# Altium PCB Carte_Barriere_Optique_Interface.PcbDoc
Units mm, origin at the board's own origin, x right, y up, seen from the top; angles counter-clockwise.
Board outline 16.25 x 52.25 mm, 2 copper layers (Top Layer, Bottom Layer); 28 components, 18 nets, 72 pads, 0 vias.
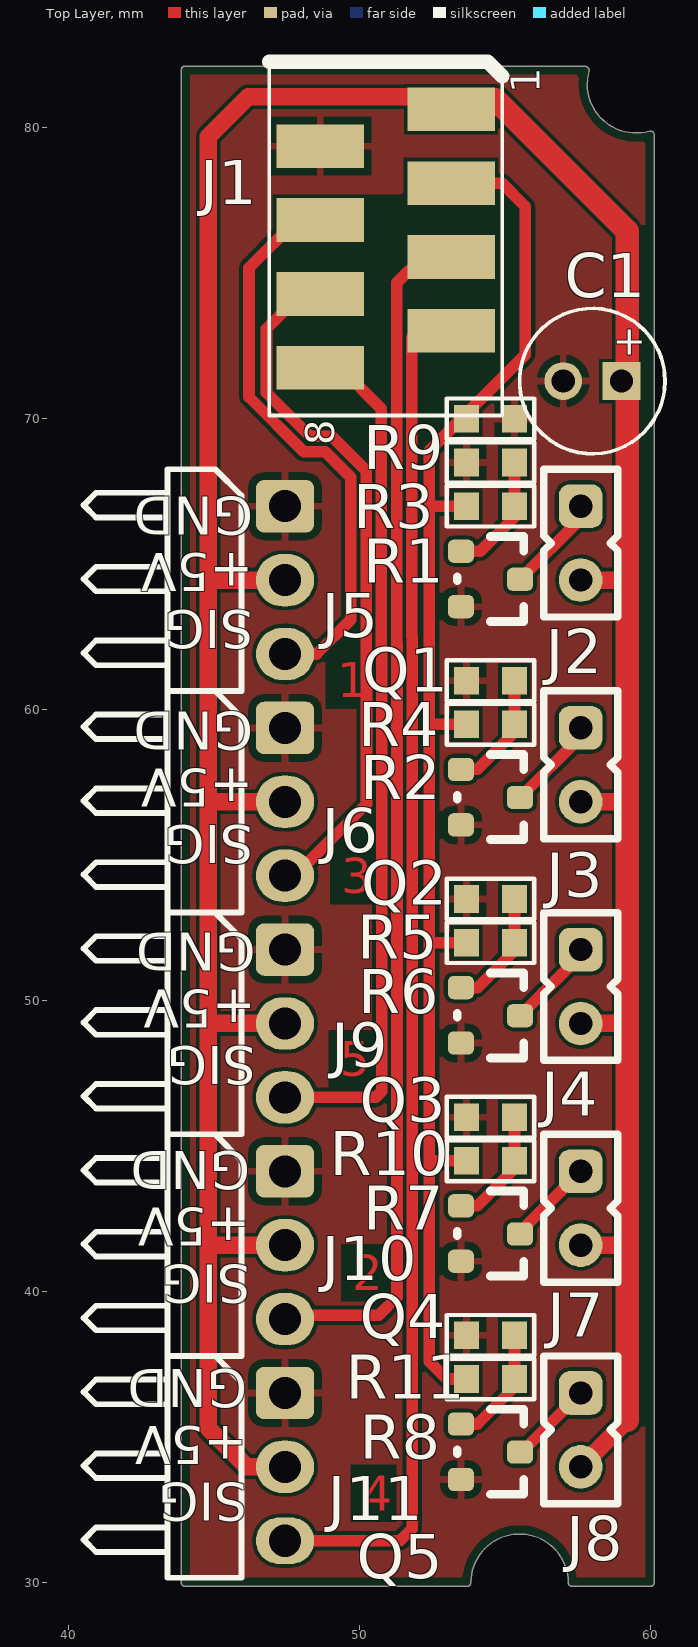
[diagram p0: Top Layer view]
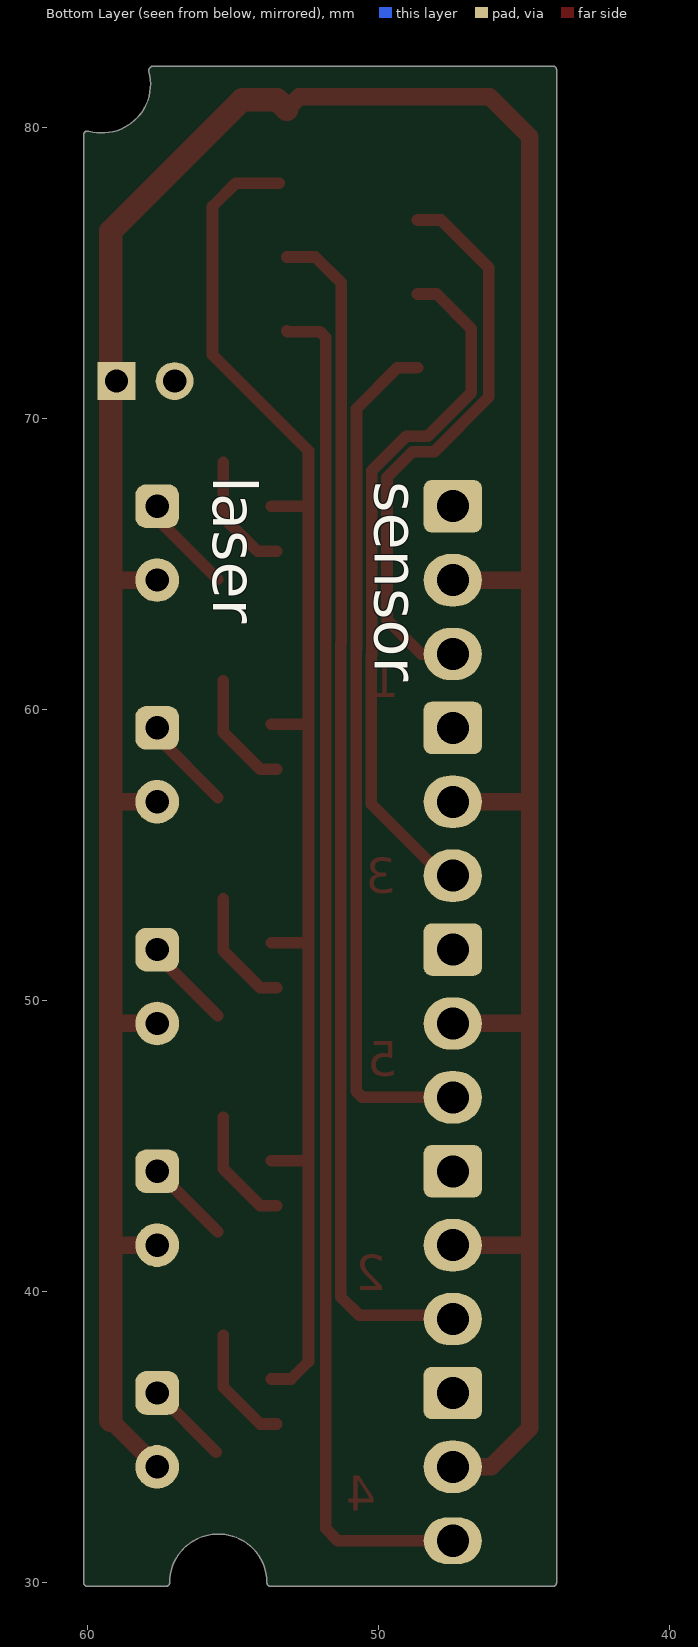
[diagram p1: Bottom Layer view, seen from below]
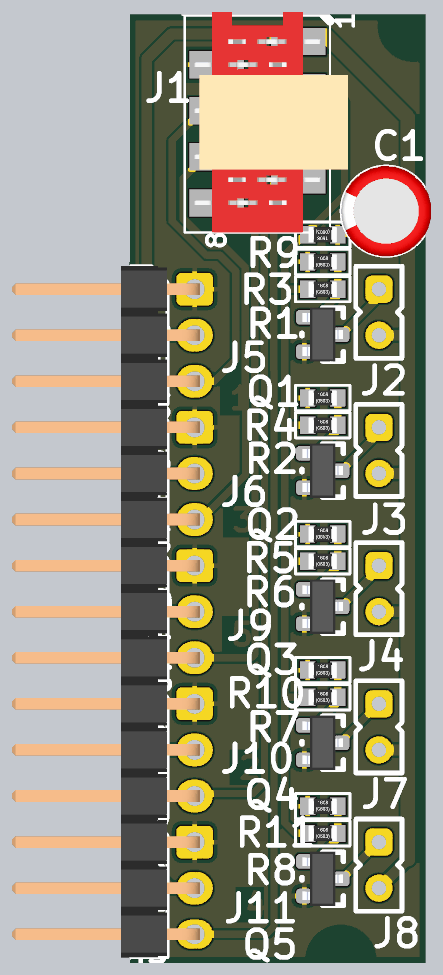
[diagram p2: 3D render of the assembled board from above, using the file's embedded part models]

## Layer stack, top to bottom
Top Solder: solder mask 0.0102, Solder Resist, Dk 3.5
Top Layer: signal copper 0.0356
Dielectric 1: dielectric 0.32, FR-4, Dk 4.8
Bottom Layer: signal copper 0.0356
Bottom Solder: solder mask 0.0102, Solder Resist, Dk 3.5

## Board outline
44,29.873 53.7,29.873 ccw(c53.7,30) 53.827,30 cw(c55.5,30) 57.173,30 ccw(c57.3,30) 57.3,29.873 60,29.873 ccw(c60,30) 60.127,30 60.127,79.768 ccw(c60,79.768) 59.996,79.896 ccw(c59.991,79.768) 59.956,79.891 cw(c59.5,81.5) 57.886,81.94 ccw(c57.763,81.974) 57.891,81.974 ccw(c57.763,81.974) 57.839,82.076 ccw(c57.737,82) 57.737,82.127 44,82.127 ccw(c44,82) 43.873,82 43.873,30 ccw(c44,30)

## Design rules (kind name [scope] priority, off if disabled: settings)
AssemblyTestPointUsage [All] p1 off:
AssemblyTestpoint [All] p1 off: testpointundercomponent=TRUE minsize=1.016 maxsize=2.54 preferedsize=1.524 minholesize=0 maxholesize=1.016 preferedholesize=0.813 testpointgrid=0.025 usegrid=TRUE gridtolerance=0 allowsidetop=TRUE allowsidebottom=TRUE
BoardOutlineClearance [All] p1: gap=0.3
Clearance [All] p1: gap=0.125
ComponentClearance [All] p1: gap=0.2 collisioncheckmode=3 verticalgap=1 showdistances=FALSE
DiffPairsRouting [All] p1 off: maxlimit=0.254 minlimit=0.254 mostfreqgap=0.254 toplayer_minwidth=0.381 toplayer_maxwidth=0.381 toplayer_prefwidth=0.381 bottomlayer_minwidth=0.381 bottomlayer_maxwidth=0.381 bottomlayer_prefwidth=0.381 maxuncoupledlength=12.7
FabricationTestPointUsage TestPointUsage [All] p1 off: valid=0 allowmultiple=FALSE
FabricationTestpoint Testpoint [All] p1 off: side=3 testpointundercomponent=TRUE minsize=1.016 maxsize=2.54 preferedsize=1.524 minholesize=0 maxholesize=1.016 preferedholesize=0.813 testpointgrid=0.025 allowsidetop=TRUE allowsidebottom=TRUE usegrid=TRUE gridtolerance=0
FanoutControl Fanout_BGA [IsBGA] p1 off: bgadir=Out bgaviamode=Centered fanoutstyle=Auto fanoutdirection=Alternating viagrid=0.025 // Fanout_BGA (Default Rule)
FanoutControl Fanout_LCC [IsLCC] p2 off: bgadir=Out bgaviamode=Centered fanoutstyle=Auto fanoutdirection=Alternating viagrid=0.025 // Fanout_LCC (Default Rule)
FanoutControl Fanout_SOIC [IsSOIC] p3 off: bgadir=Out bgaviamode=Centered fanoutstyle=Auto fanoutdirection=Alternating viagrid=0.025 // Fanout_SOIC (Default Rule)
FanoutControl Fanout_Small [(CompPinCount < 5)] p4 off: bgadir=Out bgaviamode=Centered fanoutstyle=Auto fanoutdirection=OutThenIn viagrid=0.025 // Fanout_Small (Default Rule)
FanoutControl Fanout_Default [All] p5 off: bgadir=Out bgaviamode=Centered fanoutstyle=Auto fanoutdirection=Alternating viagrid=0.025 // Fanout_Default (Default Rule)
Height [All] p1: minheight=0 maxheight=13 prefheight=10
HoleSize [All] p1: absolutevalues=TRUE maxlimit=6 minlimit=0.15 maxpercent=80.000 minpercent=20.000
HoleToHoleClearance [All] p1: gap=0.4 allowstackedmicrovias=TRUE
MinimumAnnularRing [All] p1: minimumring=0.15
MinimumSolderMaskSliver [All] p1: minsoldermaskwidth=0.15
MinimumSolderMaskSliver SilkscreenOverComponentPads [All] p2 off: minsoldermaskwidth=0.254
NetAntennae [All] p1 off: netantennaetolerance=0
PlaneClearance [All] p1: clearance=0.5
PlaneConnect [All] p1: planeconnectstyle=Relief reliefexpansion=0.4 reliefentries=4 reliefconductorwidth=0.3 reliefairgap=0.2
PolygonConnect [All] p1: connectstyle=Relief reliefconductorwidth=0.25 reliefentries=4 polygonreliefangle="90 Angle" airgapwidth=0.254
RoutingCorners [All] p1: cornerstyle=45-Degree minsetback=1.5 maxsetback=2.54
RoutingVias [All] p1: holewidth=0.2 width=0.5 viastyle="Through Hole" minholewidth=0.2 minwidth=0.4 maxholewidth=0.2 maxwidth=0.6
SilkToSilkClearance [All] p1 off: silktosilkclearance=0.1
SolderMaskExpansion [All] p1: expansion=0.075
Width [All] p1: maxlimit=4 minlimit=0.125 preferedwidth=0.6
10 further rules are at their usual default settings.

## Components (designator, comment, footprint, x,y, rotation, side; value= is the part's Value field where it differs from the comment)
C1 "10 uF" WCAP-ATG8_5x11x2x0.5 58,71.3 r0 top
J1 "690367280876" 690367280876 50.9,76.2 r90 top locked
J2 "22-03-2021" 22-03-2021 57.6,65.73 r270 top locked
J3 "22-03-2021" 22-03-2021 57.6,58.11 r270 top locked
J4 "22-03-2021" 22-03-2021 57.6,50.49 r270 top locked
J5 "61300311021" 61300311021#1 47.44,64.46 r270 top locked
J6 "61300311021" 61300311021#1 47.44,56.84 r270 top locked
J7 "22-03-2021" 22-03-2021 57.6,42.87 r270 top locked
J8 "22-03-2021" 22-03-2021 57.6,35.25 r270 top locked
J9 "61300311021" 61300311021#1 47.44,49.22 r270 top locked
J10 "61300311021" 61300311021#1 47.44,41.6 r270 top locked
J11 "61300311021" 61300311021#2 47.44,33.98 r270 top locked
Q1 "IRLML2502" SOT-23 54.5,64.5 r270 top
Q2 "IRLML2502" SOT-23 54.5,57 r270 top
Q3 "IRLML2502" SOT-23 54.5,49.5 r270 top
Q4 "IRLML2502" SOT-23 54.5,42 r270 top
Q5 "IRLML2502" SOT-23 54.5,34.5 r270 top
R1 "RC0603FR-07330RL" RESC1608X06N 54.5,67 r0 top
R2 "RC0603FR-07330RL" RESC1608X06N 54.5,59.5 r0 top
R3 "RC0603FR-0710KL" RESC1608X06N 54.5,68.5 r0 top
R4 "RC0603FR-0710KL" RESC1608X06N 54.5,61 r0 top
R5 "RC0603FR-0710KL" RESC1608X06N 54.5,53.5 r0 top
R6 "RC0603FR-07330RL" RESC1608X06N 54.5,52 r0 top
R7 "RC0603FR-07330RL" RESC1608X06N 54.5,44.5 r0 top
R8 "RC0603FR-07330RL" RESC1608X06N 54.5,37 r0 top
R9 "RC0603FR-0710KL" RESC1608X06N 54.5,70 r180 top
R10 "RC0603FR-0710KL" RESC1608X06N 54.5,46 r0 top
R11 "RC0603FR-0710KL" RESC1608X06N 54.5,38.5 r0 top

## Footprints (in the part's own frame and the unit in brackets; to place one, negate y for a bottom-side part, rotate by r counter-clockwise, add the part's x,y. Pads: shape width x height; smd on the part's side, far side on the other; paste and mask are expansions set on the pad)
22-03-2021 [mm]
  round 1.5 hole 0.8: 1(1.27,0)
  rrect50% 1.5x1.5 hole 0.8: 2(-1.27,0)
  silkscreen extent -2.54,-1.27 2.54,1.27, body extent -2.54,-1.27 2.54,1.27, height 11.6
61300311021#1 [mm] "3 pins, 1 row, right angled, gold plating"
  rrect30% 1.8x2 hole 1.1: 1(-2.54,0)
  oval 1.8x2 hole 1.1: 2(0,0) 3(2.54,0)
  silkscreen extent -3.81,-6.92 3.81,-1.5, body extent -3.81,-10.06 3.81,0.3, height 2.55
61300311021#2 [mm] "3 pins, 1 row, right angled, gold plating"
  rrect30% 1.8x2 hole 1.1: 1(-2.54,0)
  oval 1.8x2 hole 1.1: 2(0,0)
  oval 1.6x2 hole 1.1: 3(2.54,0)
  silkscreen extent -3.81,-6.92 3.81,-1.5, body extent -3.81,-10.06 3.81,0.3, height 2.55
690367280876 [mm] "8 pins, SMT, straight, without Latch"
  rect 1.5x3 smd: 1(4.445,-2.25) 2(3.175,2.25) 3(1.905,-2.25) 4(0.635,2.25) 5(-0.635,-2.25) 6(-1.905,2.25) 7(-3.175,-2.25) 8(-4.445,2.25)
  silkscreen extent -6.08,-4 6.08,4, body extent -6.08,-5 6.08,3.5, height 5.75
RESC1608X06N [mm] "Chip Resistor, 2-Leads, Body 1,6x0,8mm, IPC Medium Density"
  rect 0.85x0.95 smd: 1(-0.825,0) 2(0.825,0)
  silkscreen extent -1.5,-0.7 1.5,0.7, body extent -0.77,-0.42 0.78,0.43, height 0.45
SOT-23 [mm]
  rrect50% 0.8x0.9 smd: 1(-0.952,-1.016) 2(0.953,-1.016) 3(0.013,1.016)
  silkscreen extent -1.46,-1.14 1.46,1.14, body extent -1.5,-1.13 1.5,1.13, height 1.22
WCAP-ATG8_5x11x2x0.5 [mm] "Polarized capacitors, Aluminum Electrolytic Capacitors, 2-Leads, Body 5x11x2x0.5"
  rect 1.3x1.3 hole 0.8: 1(1,0)
  round 1.3 hole 0.8: 2(-1,0)
  silkscreen extent -2.5,-2.5 2.5,2.5, body extent -2.49,-2.5 2.48,2.49, height 11.11

## Part data
C1: library part "WCAP-ATG8, 860010672009", "CAP Alu 10 UF 20% 50 V"
J1: "WR-MM 8p Female SMT Connector with Polarization"
J5 J6 J9 J10 J11: "CONN HEADER 3p horiz. 2.54mm"
Q1 Q2 Q3 Q4 Q5: "MOSFET CANAL N SOT-23"
R1 R2 R6 R7 R8: "RES SMD 330 OHM 1% 1/10W 0603"
R3 R4 R5 R9 R10 R11: "RES SMD 10K OHM 1% 1/10W 0603"

## Nets (pads, with @x,y where several pads share a name; then routed paths per layer and width w, separated by ;. In a path a pad name is that pad's centre, name@x,y a point inside that pad or via, vN(x,y) a via of type N, cw(c..) or ccw(c..) an arc to the next point about the centre after c; other vN are vias at no path point)
5L: C1.1 J1.1 J2.1 J3.1 J4.1 J5.2 J6.2 J7.1 J8.1 J9.2 J10.2 J11.2 | length 124.4
  Top Layer w0.6: 44.8,49.22 J9.2 ; 44.8,56.84 J6.2 ; 44.8,64.46 J5.2 ; J11.2 46.12,33.98 44.8,35.3 44.8,41.6 ; J10.2 44.8,41.6 ; J1.1 52.72,81.075 46.175,81.075 44.8,79.7 44.8,41.6 ; J8.1 59.2,35.58 ; J7.1 59.2,41.6 ; J4.1 59.2,49.22 ; J3.1 59,56.84 ; J2.1 59,64.46
  Top Layer w0.8: J1.1 53.48,80.975 54.675,80.975 59.2,76.45 59.2,49.22 59.2,41.6 59.2,35.58
ENABLE: J1.3 R1.1 R2.1 R6.1 R7.1 R8.1 R9.2 | length 50.1
  Top Layer w0.4: 52.5,44.5 R7.1 ; 52.5,67 R1.1 ; J1.3@53.4,78.1 54.9,78.1 55.7,77.3 55.7,72.2 52.4,68.9 52.4,59.5 ; R8.1 53,37 52.4,37.6 52.4,52 ; R6.1 52.4,52 ; R2.1 52.4,59.5 ; 52.4,52 52.4,59.5
GND: C1.2 J1.2 J5.1 J6.1 J9.1 J10.1 J11.1 Q1.2 Q2.2 Q3.2 Q4.2 Q5.2 R3.1 R4.1 R5.1 R9.1 R10.1 R11.1
LASER_1: Q1.1 R1.2 R3.2 | length 4.2
  Top Layer w0.4: Q1.1 54.153,65.453 55.325,66.625 R1.2 R3.2
LASER_2: Q2.1 R2.2 R4.2 | length 4.1
  Top Layer w0.4: Q2.1 54.053,57.953 55.325,59.225 R2.2 R4.2
LASER_3: Q3.1 R5.2 R6.2 | length 4.1
  Top Layer w0.4: Q3.1 54.053,50.453 55.325,51.725 R6.2 R5.2
LASER_4: Q4.1 R7.2 R10.2 | length 4.1
  Top Layer w0.4: Q4.1 54.053,42.952 55.325,44.225 R7.2 R10.2
LASER_5: Q5.1 R8.2 R11.2 | length 4.1
  Top Layer w0.4: Q5.1 54.053,35.452 55.325,36.725 R8.2 R11.2
NetJ2_2: J2.2 Q1.3 | length 3.4
  Top Layer w0.4: Q1.3 57.6,66.571 J2.2
NetJ3_2: J3.2 Q2.3 | length 3.3
  Top Layer w0.4: Q2.3 57.6,59.071 J3.2
NetJ4_2: J4.2 Q3.3 | length 3.1
  Top Layer w0.4: Q3.3 57.6,51.571 J4.2
NetJ7_2: J7.2 Q4.3 | length 2.9
  Top Layer w0.4: Q4.3@55.516,42.056 J7.2
NetJ8_2: J8.2 Q5.3 | length 2.9
  Top Layer w0.4: Q5.3@55.567,34.487 J8.2
SIG_1: J1.4 J5.3 | length 19.9
  Top Layer w0.4: J5.3 48.52,61.92 49.7,63.1 49.7,68 48.825,68.875 48.078,68.875 46.2,70.753 46.2,75.2 47.835,76.835 J1.4
SIG_2: J1.5 J10.3 | length 41.3
  Top Layer w0.4: J10.3 47.573,39.193 50.66,39.193 51.287,39.819 51.287,62.297 51.275,62.309 51.275,74.675 52.165,75.565 J1.5
SIG_3: J1.6 J6.3 | length 24.4
  Top Layer w0.4: J6.3 47.775,54.3 50.237,56.762 50.237,61.862 50.225,61.874 50.225,68.217 49.042,69.4 48.295,69.4 46.8,70.895 46.8,73.1 47.995,74.295 J1.6
SIG_4: J1.7 J11.3 | length 46.9
  Top Layer w0.4: J11.3 51.39,31.44 51.812,31.862 51.812,62.515 51.8,62.526 51.8,72.8 52,73 53.125,73 J1.7
SIG_5: J1.8 J9.3 | length 29.6
  Top Layer w0.4: J9.3 50.555,46.68 50.762,46.887 50.762,62.08 50.75,62.091 50.75,70.35 49.345,71.755 J1.8

## Polygon pours and split planes (outlines as drawn)
GND on Top Layer "GND" (solid, pour order 0): 43.4,82.8 60.7,82.8 60.7,30.1 43.4,30.1

## Other copper
Top Layer:
  pour cut-out: 47.025,77.71 47.025,76.356 45.869,75.2 45.894,75.175 45.894,70.59 47.884,68.6 52.1,68.6 55.7,72.2 55.5,72.4 55.5,77.5 55.3,77.7
  text "1" at 49.225,60.425 h1.2
  text "3" at 49.375,53.7 h1.2
  text "5" at 49.325,47.4 h1.2
  text "2" at 49.75,40.05 h1.2
  text "4" at 50.075,32.475 h1.2

## Silkscreen, mask and mechanical layers (free items; w line width, h text height)
Bottom Overlay:
  text "laser" at 55.675,68.025 h1.52 r90
  text "sensor" at 50.125,67.85 h1.52 r90
Mechanical 1:
  lines w0.254: 53.7,29.75 43.75,29.75 43.75,82.25 57.861,82.25 ; 53.7,30 cw(c55.5,30) 57.3,30 ; 57.3,29.75 60.25,29.75 60.25,79.861 ; 57.861,82.245 ccw(c59.5,81.5) 60.249,79.863

## Dimensions
57.861,82.25 to 60.25,29.75 on Mechanical 1
43.75,29.75 to 60.25,79.861 on Mechanical 1

## Text inside footprints (layer, text, board x,y; h text height)
C1: Top Overlay "+" at 58.7,72.2 h1
J1: Top Overlay "1" at 56.2,81.2 h1 r90; Top Overlay "8" at 49.122,69.088 h1 r90
J5: Top Overlay "SIG / +5V / GND" at 46.34,67.33 h1.3 r180
J6: Top Overlay "SIG / +5V / GND" at 46.34,59.93 h1.3 r180
J9: Top Overlay "SIG / +5V / GND" at 46.44,52.33 h1.3 r180
J10: Top Overlay "SIG / +5V / GND" at 46.24,44.83 h1.3 r180
J11: Top Overlay "SIG / +5V / GND" at 46.14,37.33 h1.3 r180